# Altium PCB lm2596.PcbDoc
Units mm, origin at the board's own origin, x right, y up, seen from the top; angles counter-clockwise.
Board outline 45 x 27.5 mm, 2 copper layers (Top Layer, Bottom Layer); 7 components, 5 nets, 22 pads, 49 vias.
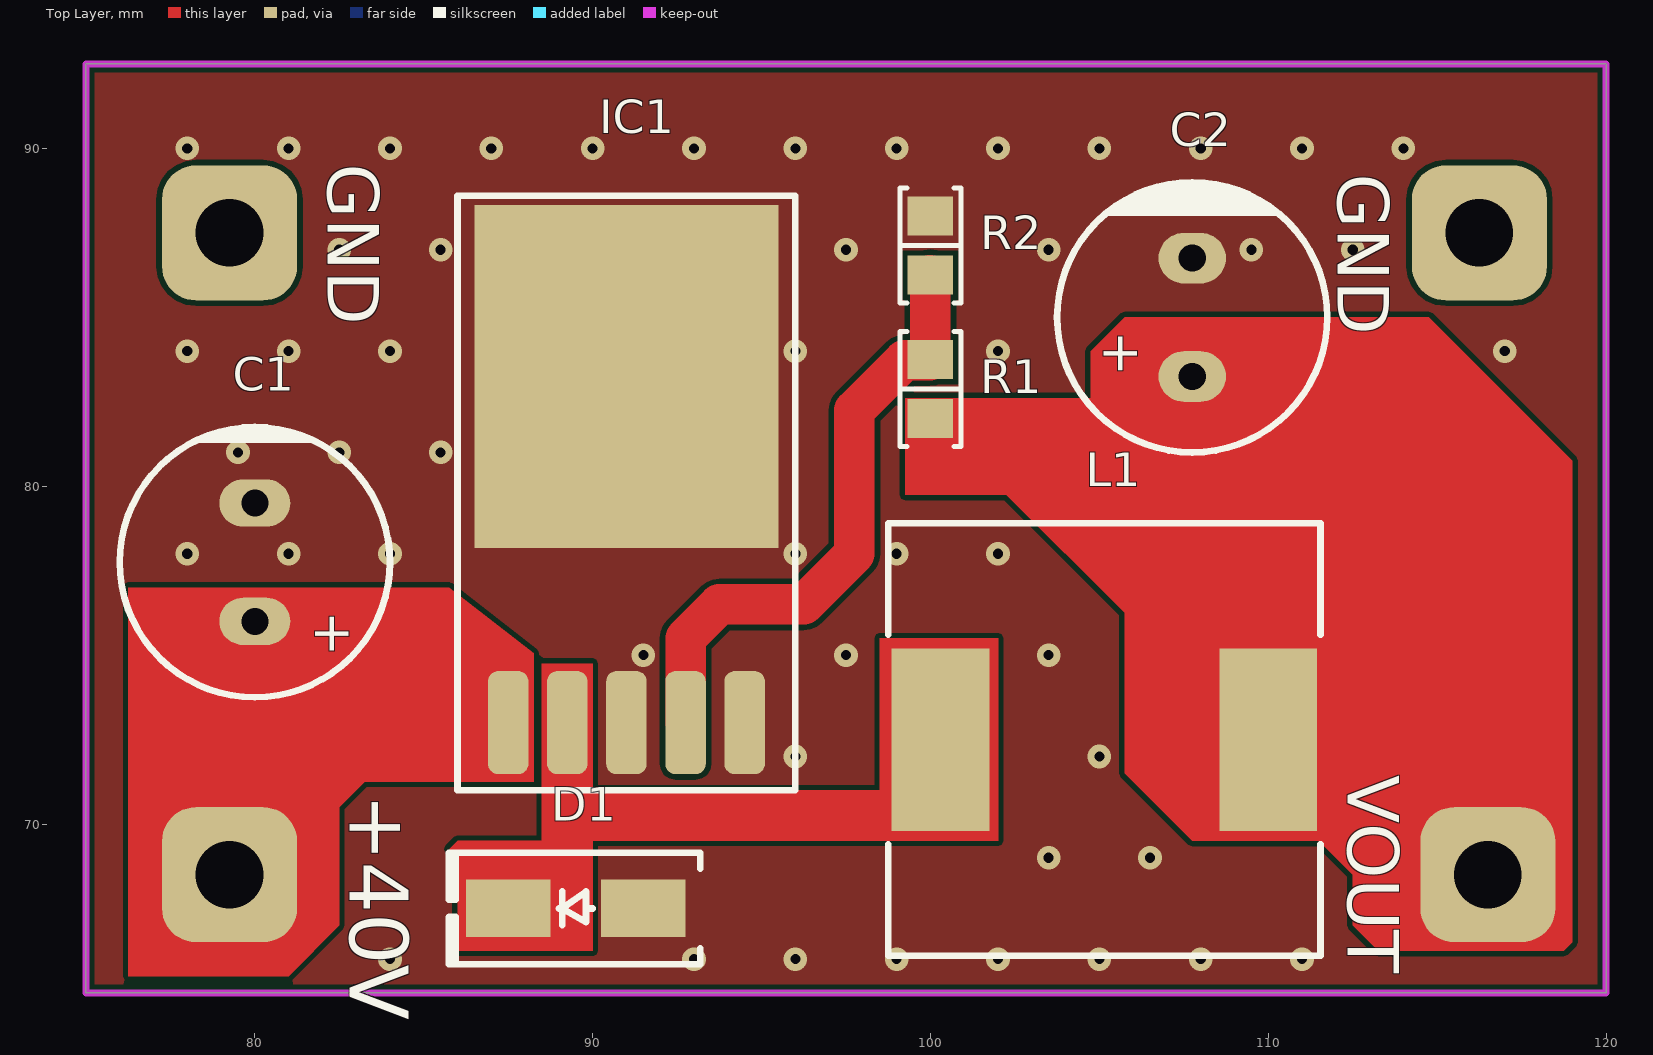
[diagram p0: Top Layer view]
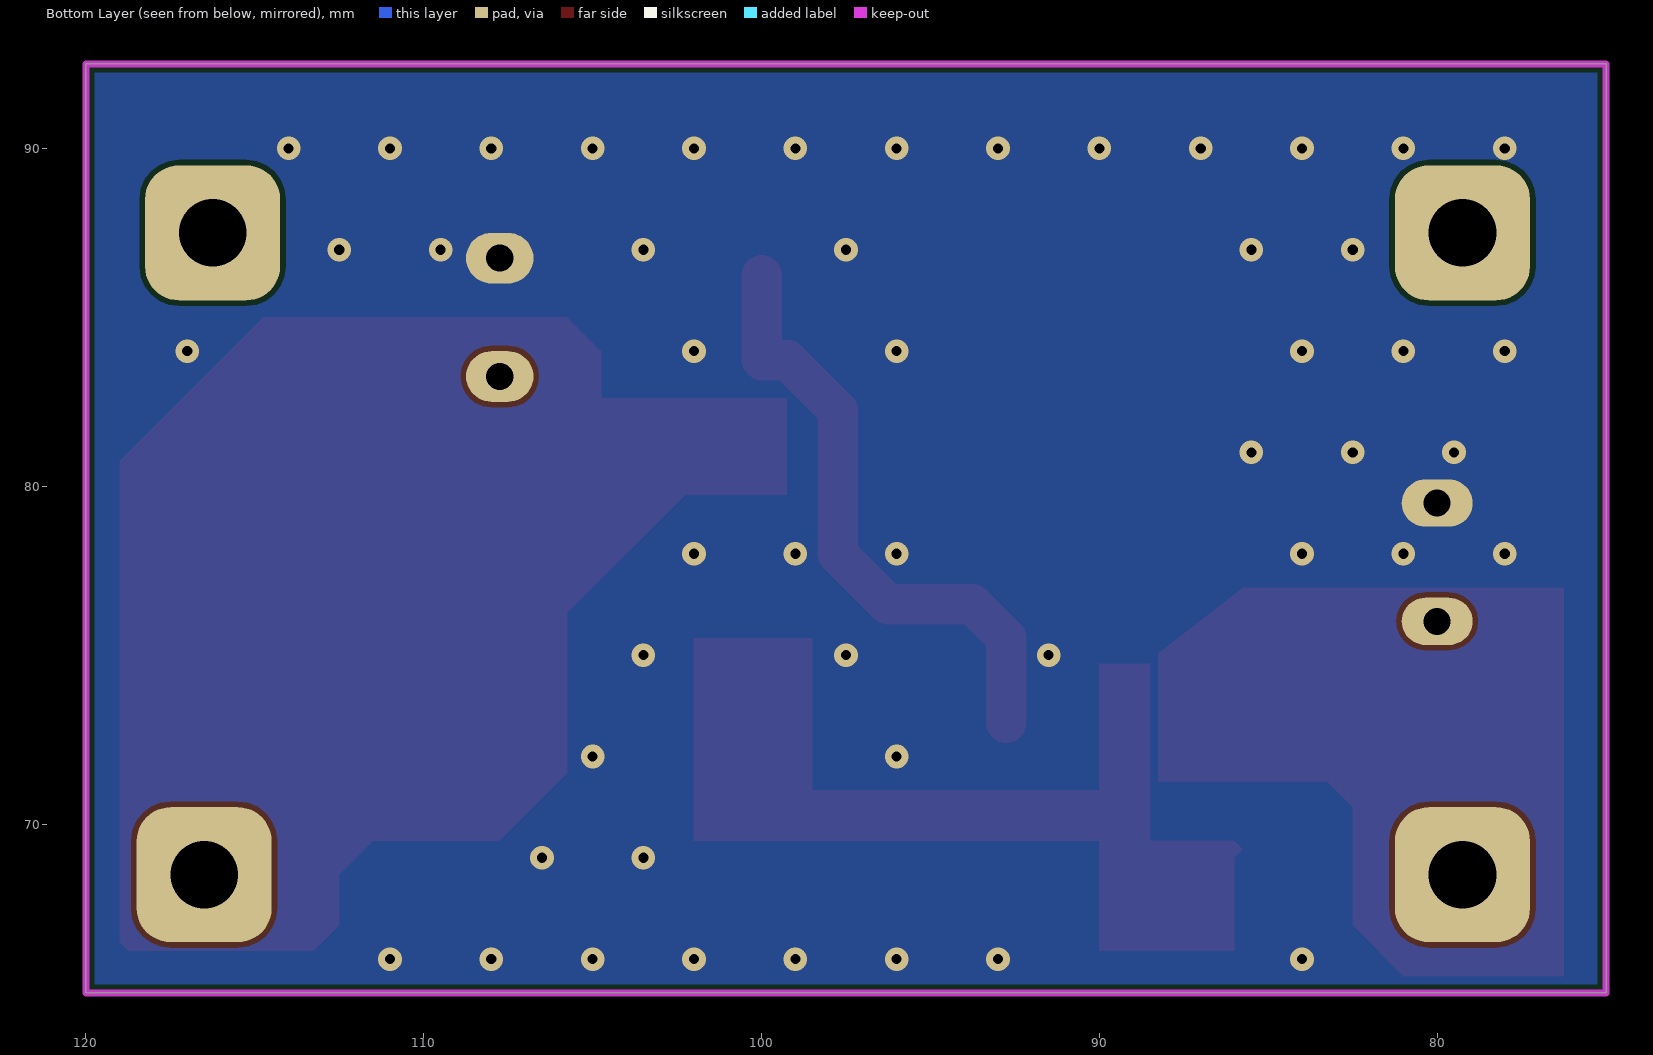
[diagram p1: Bottom Layer view, seen from below]
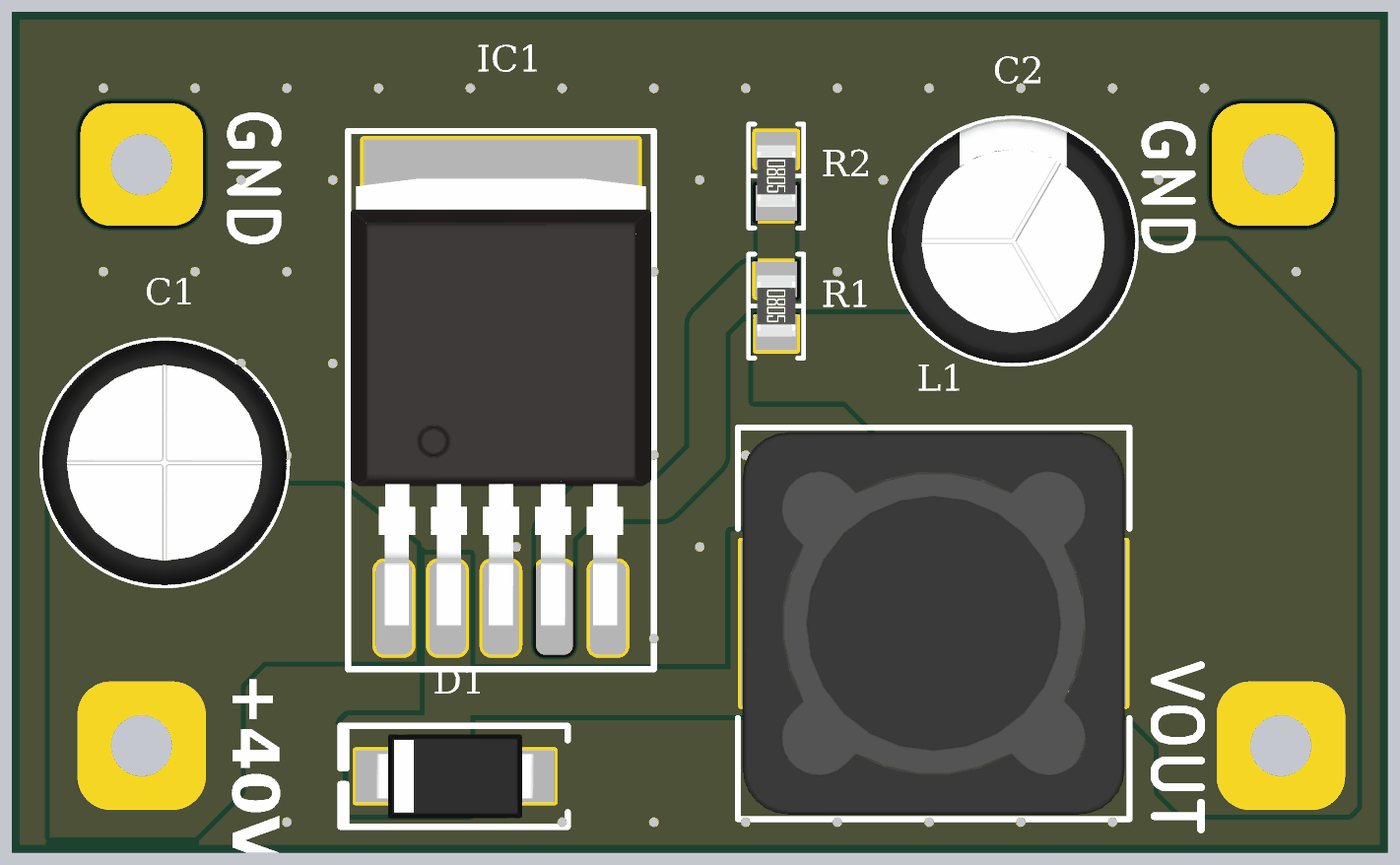
[diagram p2: 3D render of the assembled board from above, using the file's embedded part models]

## Layer stack, top to bottom
Top Solder: solder mask 0.0102, Solder Resist, Dk 3.5
Top Layer: signal copper 0.0356
Dielectric 1: dielectric 0.32, FR-4, Dk 4.8
Bottom Layer: signal copper 0.0356
Bottom Solder: solder mask 0.0102, Solder Resist, Dk 3.5

## Board outline
75,65 120,65 120,92.5 75,92.5

## Design rules (kind name [scope] priority, off if disabled: settings)
Clearance [All] p1: gap=0.152 ignorepadtopadclearanceinfootprint=FALSE
HoleSize [All] p1: absolutevalues=TRUE maxlimit=5 minlimit=0.025 maxpercent=80.000 minpercent=20.000
PolygonConnect [All] p1: thpad.connectstyle=Direct thpad.reliefconductorwidth=0.254 thpad.reliefentries=4 thpad.polygonreliefangle="90 Angle" thpad.airgapwidth=0.254 smdpad.connectstyle=Relief smdpad.reliefconductorwidth=0.5 smdpad.reliefentries=4 smdpad.polygonreliefangle="90 Angle" smdpad.airgapwidth=0.2 via.connectstyle=Direct via.reliefconductorwidth=0.254 via.reliefentries=4 via.polygonreliefangle="90 Angle" via.airgapwidth=0.254
RoutingVias [All] p1: holewidth=0.711 width=1.27 viastyle="Through Hole" minholewidth=0.711 minwidth=1.27 maxholewidth=0.711 maxwidth=1.27
SolderMaskExpansion [All] p1: expansion=0.102 istentingtop=FALSE
Width [All] p1: maxlimit=2 minlimit=0.152 preferedwidth=0.5
29 further rules are at their usual default settings.

## Components (designator, comment, footprint, x,y, rotation, side; value= is the part's Value field where it differs from the comment)
C1 "100µF" "CAP TH ALUM ELEC D8.00mm S3.50mm H12.50mm" 80,77.75 r270 top
C2 "220 µF" "CAP AL TH D8 L3.5 H12.5" 107.75,85 r90 top
D1 "ACDBA560-HF" "DO214AC SMA" 89.5,67.5 r180 top
IC1 "LM2596" LM2596 91,82 r0 top
L1 "33 µH" "BOURNS SRR1280" 105.15,72.5 r0 top
R1 "10 kOhms" "RES 0805_2012" 100,82.875 r270 top
R2 "4.7 kOhms" "RES 0805_2012" 100,87.125 r270 top

## Footprints (in the part's own frame and the unit in brackets; to place one, negate y for a bottom-side part, rotate by r counter-clockwise, add the part's x,y. Pads: shape width x height; smd on the part's side, far side on the other; paste and mask are expansions set on the pad)
"BOURNS SRR1280" [mm] "Precision Wire Wound Inductor, 2-Leads, Body 12.50x12.50mm, IPC Medium Density"
  rect 2.9x5.4 smd: 1(-4.85,0) 2(4.85,0)
  silkscreen extent -6.4,-6.4 6.4,6.4, body extent -6.25,-6.25 6.25,6.25, height 7.9
"CAP AL TH D8 L3.5 H12.5" [mm] "8MM Diameter, 3.5MM Lead Spacing Aluminium Capacitor"
  oval 1.5x2 hole 0.8: 1(-1.75,0) 2(1.75,0)
  silkscreen extent -4,-4 4,4, body extent -4,-4 4,4, height 11.5
"CAP TH ALUM ELEC D8.00mm S3.50mm H12.50mm" [mm] "8mm Diameter 3.5mm Lead Spacing Aluminum Electrolytic Capacitors Radial, Can"
  oval 1.4x2.1 hole 0.8: 1(1.75,0) 2(-1.75,0)
  silkscreen extent -4,-4 4,4, body extent -4.01,-4 4,4, height 12.5
"DO214AC SMA" [mm] "Molded Diode, 2-Leads, Body 4.30x2.60mm, IPC Medium Density"
  rect 2.5x1.7 smd: 1(-2,0) 2(2,0)
  silkscreen extent -3.68,-1.65 3.75,1.65, body extent -2.6,-1.37 2.6,1.37, height 2.4
LM2596 [mm] "DC-DC BUCK/D2PAK"
  rrect50% 1.2x3.05 smd: 1(-3.5,-9) 2(-1.75,-9) 3(0,-9) 4(1.75,-9) 5(3.5,-9)
  rect 9x10.16 smd: 3(0,1.25)
  silkscreen extent -5,-11 5,6.6, body extent -4.91,-9.56 4.91,5.04, height 4.22
"RES 0805_2012" [mm] "Chip Resistor, 2-Leads, Body 2.00x1.25mm, IPC Medium Density"
  rect 1.15x1.35 smd: 1(-0.875,0) 2(0.875,0)
  silkscreen extent -1.7,-0.9 1.7,0.9, body extent -1,-0.62 1,0.63, height 0.6

## Part data
C1: library part ECA-1JM101, "CAP ALUM 100UF 20% 63V RADIAL", Device Package="Radial, Can", Lifetime @ Temp.="2000 Hrs @ 85°C", Manufacturer="Panasonic Electronic Components", Operating Temperature="-40°C ~ 85°C", Ripple Current @ High Frequency="459mA @ 10kHz", Ripple Current @ Low Frequency="270mA @ 120Hz", Supplier Part Number 1=P5193-ND, Tolerance=±20%, Voltage - Rated=63V, Applications="General Purpose", Capacitance=100µF, ComponentLink1Description=Datasheet, ComponentLink1URL=//media.digikey.com/pdf/Data%20Sheets/Panasonic%20Electronic%20Components/ECA-xxM%20Series,TypeA.pdf, ComponentLink2Description="DigiKey Link", ComponentLink2URL=http://digikey.com/product-detail/en/panasonic-electronic-components/ECA-1JM101/P5193-ND/245052, Height - Seated (Max)="0.492\" (12.50mm)", LastUpdated="7.09.2020 05:24:51", Lead Spacing="0.138\" (3.50mm)", Lifecycle Status=Active, Minimum Order=1, Mounting Type="Through Hole", Package / Case="Radial, Can", Packaging=Bulk, Part Number=ECA-1JM101, Part Status=Active, PartId=7225, Polarization=Polar, Price=0.37, Series=M, Size / Dimension="0.315\" Dia (8.00mm)", Supplier 1=DigiKey
C2: library part ECA-1VM221, "CAP ALUM 220UF 20% 35V RADIAL", Device Package="Radial, Can", Lifetime @ Temp.="2000 Hrs @ 85°C", Manufacturer="Panasonic Electronic Components", Operating Temperature="-40°C ~ 85°C", Ripple Current @ High Frequency="595 mA @ 10 kHz", Ripple Current @ Low Frequency="350 mA @ 120 Hz", Supplier Part Number 1=P5166-ND, Tolerance=±20%, Voltage - Rated="35 V", Applications="General Purpose", Capacitance="220 µF", ComponentLink1Description=Datasheet, ComponentLink1URL=//media.digikey.com/pdf/Data%20Sheets/Panasonic%20Electronic%20Components/ECA-xxM%20Series,TypeA.pdf, ComponentLink2Description="DigiKey Link", ComponentLink2URL=https://www.digikey.com/en/products/detail/panasonic-electronic-components/ECA-1VM221/245025, Height - Seated (Max)="0.492\" (12.50mm)", LastUpdated="23.05.2022 13:42:17", Lead Spacing="0.138\" (3.50mm)", Lifecycle Status=Active, Minimum Order=1, Mounting Type="Through Hole", Package / Case="Radial, Can", Packaging=Bulk, Part Number=ECA-1VM221, Part Status=Active, PartId=7280, Polarization=Polar, Price=0.10, Series=M-A, Size / Dimension="0.315\" Dia (8.00mm)", Supplier 1=DigiKey
D1: "DIODE SCHOTTKY 60V 5A DO214AC", Capacitance @ Vr, F="250pF @ 4V, 1MHz", Current - Average Rectified (Io)="5A (DC)", Current - Reverse Leakage @ Vr="500 µA @ 60 V", Manufacturer="Comchip Technology", Operating Temperature - Junction="-55°C ~ 125°C", Package / Case="DO-214AC, SMA", Supplier Device Package="DO-214AC (SMA)", Supplier Part Number 1=641-2078-1-ND, Voltage - DC Reverse (Vr) (Max)="60 V", Voltage - Forward (Vf) (Max) @ If="700 mV @ 5 A", ComponentLink1Description=Datasheet, ComponentLink1URL=http://www.comchiptech.com/admin/files/product/ACDBA560-HF%20RevA201382.pdf, ComponentLink2Description="DigiKey Link", ComponentLink2URL=https://www.digikey.com/en/products/detail/comchip-technology/ACDBA560-HF/7100903, Diode Type=Schottky, LastUpdated="23.05.2022 13:36:13", Lifecycle Status=Active, Minimum Order=1, Mounting Type="Surface Mount", Packaging=TapeAndReel, Part Number=ACDBA560-HF, Part Status=Active, PartId=1832, Price=0.15, Series="Automotive, AEC-Q101", Speed="Fast Recovery =< 500ns, > 200mA (Io)", Supplier 1=DigiKey
L1: library part SRR1280-330M, "FIXED IND 33UH 3.5A 57 MOHM SMD", Current - Saturation=3.3A, Current Rating (Amps)="3.5 A", DC Resistance (DCR)="57mOhm Max", Device Package=Nonstandard, Frequency - Self Resonant=9.5MHz, Manufacturer="Bourns Inc.", Operating Temperature="-40°C ~ 125°C", Q @ Freq="28 @ 2.52MHz", Supplier Part Number 1=SRR1280-330MCT-ND, Tolerance=±20%, Inductance Frequency - Test="100 kHz", ComponentLink1Description=Datasheet, ComponentLink1URL=https://www.bourns.com/docs/Product-Datasheets/SRR1280.pdf, ComponentLink2Description="DigiKey Link", ComponentLink2URL=https://www.digikey.com/en/products/detail/bourns-inc/SRR1280-330M/1969998, Height - Seated (Max)="0.315\" (8.00mm)", LastUpdated="23.05.2022 13:40:12", Lifecycle Status=Active, Material - Core=Ferrite, Minimum Order=1, Mounting Type="Surface Mount", Package / Case=Nonstandard, Packaging=TapeAndReel, Part Number=SRR1280-330M, Part Status=Active, PartId=25, Price=0.82, Series=SRR1280, Shielding=Shielded, Size / Dimension="0.492\" L x 0.492\" W (12.50mm x 12.50mm)", Supplier 1=DigiKey, Type=Wirewound, Inductance="33 µH"
R1: library part RNCS0805BKE10K0, "RES 10K OHM 0.1% 1/10W 0805", Device Package="0805 (2012 Metric)", Manufacturer="Stackpole Electronics Inc", Operating Temperature="-55°C ~ 155°C", Power (Watts)="0.1W, 1/10W", Ratings=AEC-Q200, Supplier Device Package=0805, Supplier Part Number 1=RNCS0805BKE10K0CT-ND, Temperature Coefficient=±25ppm/°C, Tolerance=±0.1%, ComponentLink1Description=Datasheet, ComponentLink1URL=https://www.seielect.com/catalog/sei-rncs_rnch.pdf, ComponentLink2Description="DigiKey Link", ComponentLink2URL=https://www.digikey.com/en/products/detail/stackpole-electronics-inc/RNCS0805BKE10K0/1800067, Composition="Thin Film", Features="Anti-Corrosive, Automotive AEC-Q200, Moisture Resistant", Height - Seated (Max)="0.026\" (0.65mm)", LastUpdated="23.05.2022 13:28:13", Lifecycle Status=Active, Minimum Order=1, Number of Terminations=2, Package / Case="0805 (2012 Metric)", Packaging=TapeAndReel, Part Number=RNCS0805BKE10K0, Part Status=Active, PartId=27713, Price=0.09, Resistance="10 kOhms", Series=RNCS, Size / Dimension="0.079\" L x 0.049\" W (2.00mm x 1.25mm)", Supplier 1=DigiKey
R2: library part CRGP0805F4K7, "RES 4.7K OHM 1% 1/3W 0805", Device Package="0805 (2012 Metric)", Manufacturer="TE Connectivity Passive Product", Operating Temperature="-55°C ~ 155°C", Power (Watts)="0.333W, 1/3W", Supplier Device Package=0805, Supplier Part Number 1=A130485CT-ND, Temperature Coefficient=±100ppm/°C, Tolerance=±1%, ComponentLink1Description=Datasheet, ComponentLink1URL=https://www.te.com/commerce/DocumentDelivery/DDEController?Action=srchrtrv&DocNm=9-1773463-9&DocType=DS&DocLang=English, ComponentLink2Description="DigiKey Link", ComponentLink2URL=https://www.digikey.com/en/products/detail/te-connectivity-passive-product/CRGP0805F4K7/8577087, Composition="Thick Film", Features="Pulse Withstanding", Height - Seated (Max)="0.026\" (0.65mm)", LastUpdated="23.05.2022 13:28:09", Lifecycle Status=Active, Minimum Order=1, Number of Terminations=2, Package / Case="0805 (2012 Metric)", Packaging=TapeAndReel, Part Number=CRGP0805F4K7, Part Status=Active, PartId=28726, Price=0.02, Resistance="4.7 kOhms", Series=CRGP, Size / Dimension="0.079\" L x 0.049\" W (2.00mm x 1.25mm)", Supplier 1=DigiKey

## Free pads (board coordinates)
  rrect50% 4x4 hole 2: GND(79.25,87.5) GND(116.25,87.5) VIN(79.25,68.5) VOUT(116.5,68.5)

## Via types
v1: diameter 0.7, hole 0.3, Top Layer to Bottom Layer, tented both sides, 49 vias

## Nets (pads, with @x,y where several pads share a name; then routed paths per layer and width w, separated by ;. In a path a pad name is that pad's centre, name@x,y a point inside that pad or via, vN(x,y) a via of type N, cw(c..) or ccw(c..) an arc to the next point about the centre after c; other vN are vias at no path point)
+12: C2.1 L1.2 pad.VOUT R1.2
GND: C1.2 C2.2 D1.1 IC1.3 IC1.5 R2.1
  other v1: 84,66 93,66 96,66 99,66 102,66 105,66 108,66 111,66 103.5,69 106.5,69 96,72 105,72 91.5,75 97.5,75 103.5,75 78,78 81,78 84,78 96,78 99,78 102,78 79.5,81 82.5,81 85.5,81 78,84 81,84 84,84 96,84 102,84 117,84 82.5,87 85.5,87 97.5,87 103.5,87 109.5,87 112.5,87 78,90 81,90 84,90 87,90 90,90 93,90 96,90 99,90 102,90 105,90 108,90 111,90 114,90
NetD1_2: D1.2 IC1.2 L1.1
NetR1_1: IC1.4 R1.1 R2.2 | length 18.2
  Top Layer w1.2: IC1.4 92.75,75.5 93.75,76.5 96.25,76.5 97.75,78 97.75,82.25 99.225,83.725 99.975,83.725 R1.1 R2.2
VCC: C1.1 IC1.1 pad.VIN

## Polygon pours and split planes (outlines as drawn)
GND on Top Layer "GND_L01_P000" (solid, remove dead copper, pour order 0): 75,92.5 120,92.5 120,65 75,65
GND on Bottom Layer "GND_L02_P003" (solid, remove dead copper, pour order 3): 75,92.5 120,92.5 120,65 75,65

## Keep-outs
Keep-Out Layer:
  the board outline again, w0.2

## Other copper
Top Layer:
  region net VCC: 85.75,77 88.25,75.056 88.25,71.25 83.25,71.25 82.5,70.5 82.5,67 81,65.5 76.25,65.5 76.25,77
  region net +12: 104.75,82.6 104.75,84 105.75,85 114.75,85 119,80.75 119,66.5 118.75,66.25 113.25,66.25 112.5,67 112.5,68.5 111.5,69.5 107.75,69.5 105.75,71.5 105.75,76.25 102.25,79.75 99.25,79.75 99.25,80.25 99.25,82.6
  region net NetD1_2: 90,71 98.5,71 98.5,75.5 102,75.5 102,69.5 90,69.5 90,66.25 86,66.25 86,69 85.75,69.25 86,69.5 88.5,69.5 88.5,74.75 90,74.75

## Silkscreen, mask and mechanical layers (free items; w line width, h text height)
Top Overlay:
  text "GND" at 82.154,89.546 h1.52 r270
  text "GND" at 112.054,89.246 h1.52 r270
  text "VOUT" at 112.354,71.446 h1.52 r270
  text "+40V" at 82.228,70.9 h3 r270

## Text inside footprints (layer, text, board x,y; h text height)
C1: Top Overlay "+" at 81.4,76.3 h2 r270
C2: Top Overlay "+" at 106.5,83.25 h2 r90